# Altium PCB PCB2.PcbDoc
Units mm, origin at the board's own origin, x right, y up, seen from the top; angles counter-clockwise.
Board outline 137.5 x 80 mm, 2 copper layers (Top Layer, Bottom Layer); 29 components, 27 nets, 113 pads, 0 vias.
Unrouted connection lines stored in the file: 1.
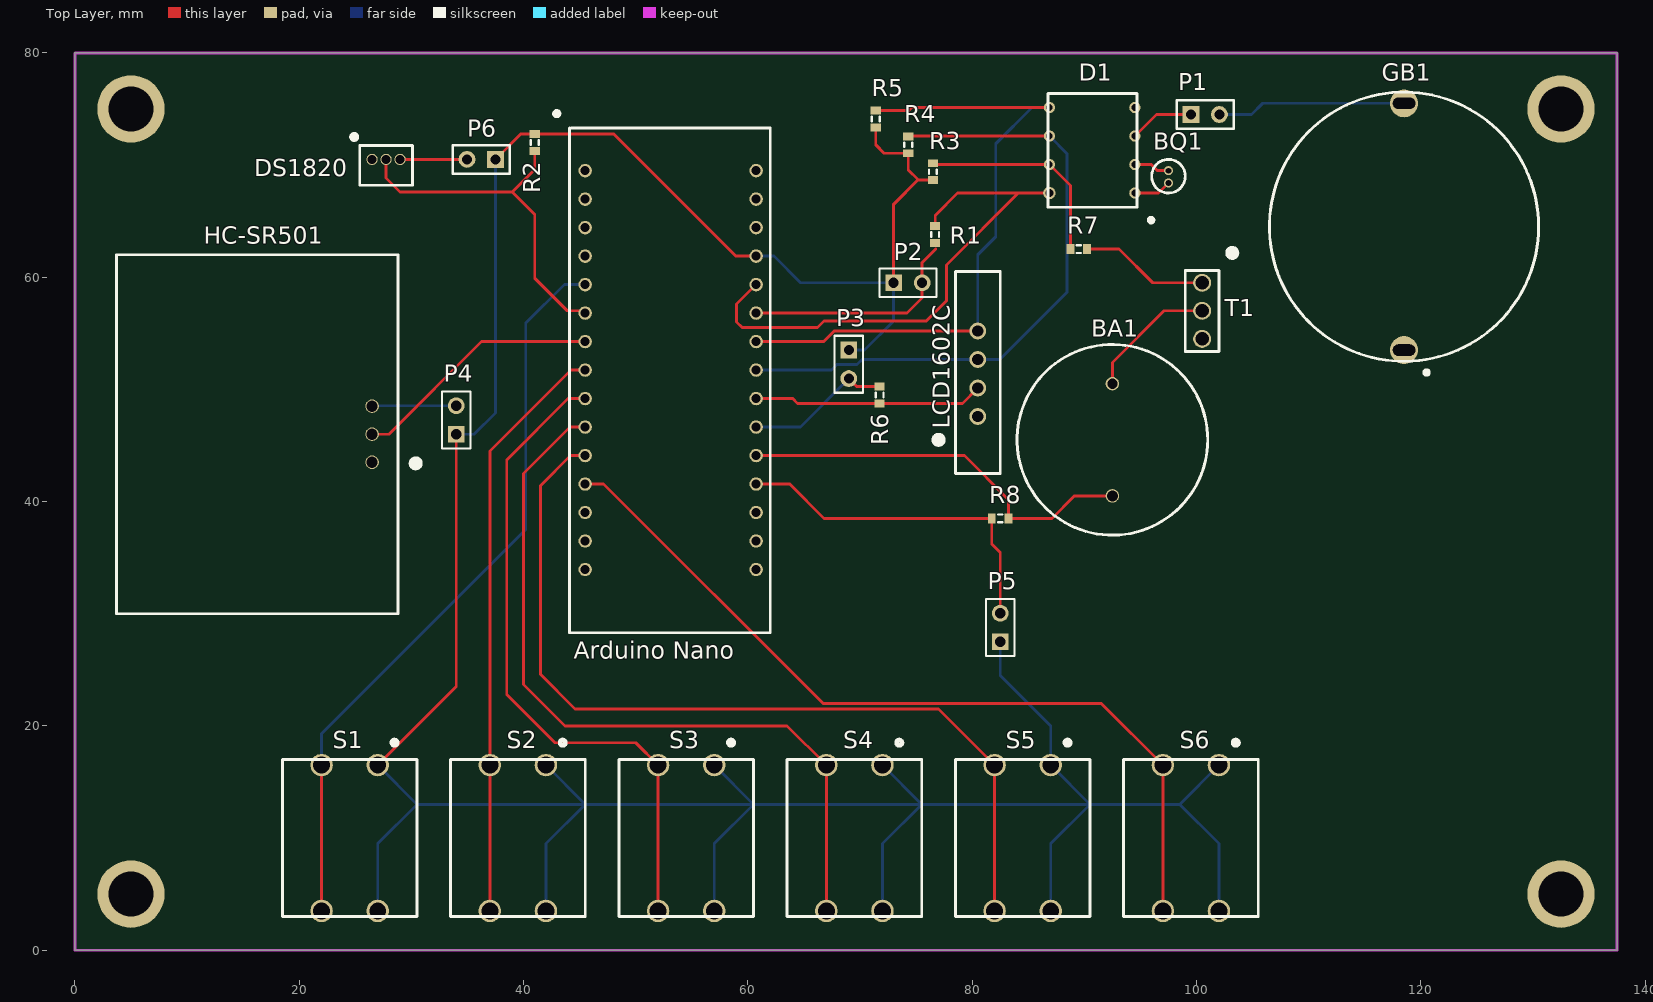
[diagram p0: Top Layer view]
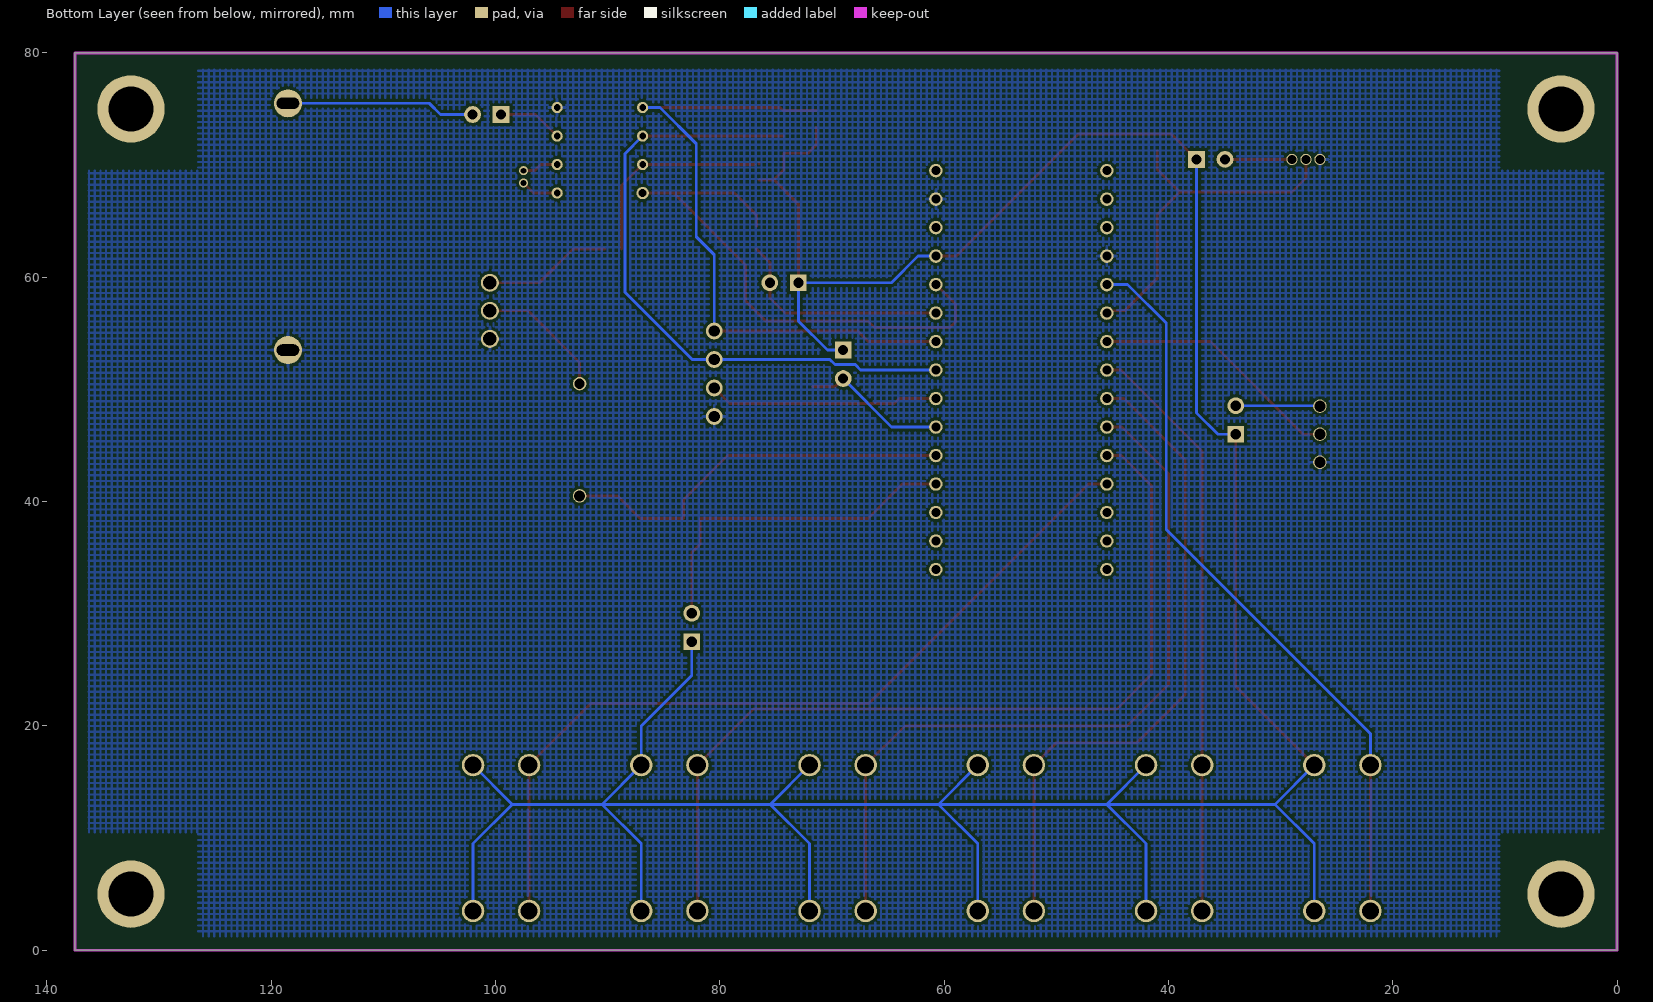
[diagram p1: Bottom Layer view, seen from below]

## Layer stack, top to bottom
Top Solder: solder mask 0.0102, Solder Resist, Dk 3.5
Top Layer: signal copper 0.0356
Dielectric 1: dielectric 0.32, FR-4, Dk 4.8
Bottom Layer: signal copper 0.0356
Bottom Solder: solder mask 0.0102, Solder Resist, Dk 3.5

## Board outline
0,0 0,80 137.5,80 137.5,0

## Design rules (kind name [scope] priority, off if disabled: settings)
Clearance [All] p1: gap=0.254
Height [All] p1: minheight=0 maxheight=100 prefheight=12.7
PolygonConnect [All] p1: connectstyle=Relief reliefconductorwidth=0.254 reliefentries=4 polygonreliefangle="90 Angle" airgapwidth=0.254
RoutingVias [All] p1: holewidth=0.711 width=1.27 viastyle="Through Hole" minholewidth=0.711 minwidth=1.27 maxholewidth=0.711 maxwidth=1.27
SolderMaskExpansion [All] p1: expansion=0.102
Width [All] p1: maxlimit=2.54 minlimit=0.15 preferedwidth=0.254
28 further rules are at their usual default settings.

## Components (designator, comment, footprint, x,y, rotation, side; value= is the part's Value field where it differs from the comment)
"Arduino Nano" "Arduino Nano" "Arduino Nano" 45.5,69.5 r90 top (schematic designator X2)
BA1 "PIEZO" "Piezo Buzzer" 92.5,45.5 r270 top
BQ1 "DT-38" DT-38 97.5,69.5 r270 top
D1 "DS1307" DS1307 94.5,67.5 r90 top
DS1820 "DS1820" DS1820 26.5,70.5 r0 top (schematic designator X4)
GB1 "CR2032" "BAT CR2032 3V" 118.5,64.5 r90 top
HC-SR501 "HC-SR501" HC-SR501 26.5,43.5 r90 top (schematic designator X3)
LCD1602C "LCD1602C" LCD1602 80.5,42.5 r90 top (schematic designator X1)
P1 "Header 2" HDR1X2 99.5,74.5 r0 top
P2 "Header 2" HDR1X2 73,59.5 r0 top
P3 "Header 2" HDR1X2 69,53.5 r270 top
P4 "Header 2" HDR1X2 34,46 r90 top
P5 "Header 2" HDR1X2 82.5,27.5 r90 top
P6 "Header 2" HDR1X2 37.5,70.5 r180 top
R1 "510" J1-0603 76.7,63.8 r270 top
R2 "4K7" J1-0603 41,72 r90 top
R3 "4K7" J1-0603 76.5,69.4 r270 top
R4 "4K7" J1-0603 74.3,71.8 r270 top
R5 "4K7" J1-0603 71.4,74.1 r270 top
R6 "2K4" J1-0603 71.75,49.5 r90 top
R7 "100" J1-0603 89.5,62.5 r180 top
R8 "510" J1-0603 82.5,38.5 r180 top
S1 "12X12 mm BUTTON" "12X12mm BUTTON" 24.5,9.5 r0 top
S2 "12X12 mm BUTTON" "12X12mm BUTTON" 39.5,9.5 r0 top
S3 "12X12 mm BUTTON" "12X12mm BUTTON" 54.5,9.5 r0 top
S4 "12X12 mm BUTTON" "12X12mm BUTTON" 69.5,9.5 r0 top
S5 "12X12 mm BUTTON" "12X12mm BUTTON" 84.5,9.5 r0 top
S6 "12X12 mm BUTTON" "12X12mm BUTTON" 99.5,9.5 r0 top
T1 "КТ315" KT315 100.5,59.5 r270 top

## Footprints (in the part's own frame and the unit in brackets; to place one, negate y for a bottom-side part, rotate by r counter-clockwise, add the part's x,y. Pads: shape width x height; smd on the part's side, far side on the other; paste and mask are expansions set on the pad)
"12X12mm BUTTON" [mm]
  round 2 hole 1.5: 1(2.5,7) 2(2.5,-6) 3(-2.5,7) 4(-2.5,-6)
  silkscreen extent -6,-6.5 6,9.32, body extent -6,-6.46 6,7.46, height 8.5
"Arduino Nano" [mm]
  round 1.2 hole 0.8: 1(0,0) 2(-2.54,0) 3(-5.08,0) 4(-7.62,0) 5(-10.16,0) 6(-12.7,0) 7(-15.24,0) 8(-17.78,0) 9(-20.32,0) 10(-22.86,0) 11(-25.4,0) 12(-27.94,0) 13(-30.48,0) 14(-33.02,0) 15(-35.56,0) 16(-35.56,-15.24) 17(-33.02,-15.24) 18(-30.48,-15.24) 19(-27.94,-15.24) 20(-25.4,-15.24) 21(-22.86,-15.24) 22(-20.32,-15.24) 23(-17.78,-15.24) 24(-15.24,-15.24) 25(-12.7,-15.24) 26(-10.16,-15.24) 27(-7.62,-15.24) 28(-5.08,-15.24) 29(-2.54,-15.24) 30(0,-15.24)
  silkscreen extent -41.2,-16.5 5.36,2.82, body extent -41.19,-16.62 3.81,1.38, height 7.85
"BAT CR2032 3V" [mm]
  round 2.5 hole 1 slot 2 at 90 deg: 1(-11,0) 2(11,0)
  silkscreen extent -13.25,-12 12,12, body extent -10.9,-10.6 10.9,10, height 4.3
DS1307 [mm]
  round 1 hole 0.6: 1(0,0) 2(2.54,0) 3(5.08,0) 4(7.62,0) 5(7.62,7.62) 6(5.08,7.62) 7(2.54,7.62)
  round 1.1 hole 0.7: 8(0,7.62)
  silkscreen extent -2.67,-1.7 8.89,7.75, body extent -1.29,-0.15 8.91,7.77, height 3.7
DS1820 [mm]
  round 1 hole 0.8: 1(0,0) 2(1.25,0) 3(2.5,0)
  silkscreen extent -1.92,-2.3 3.6,2.32, body extent -1.16,-2.48 3.67,0.95, height 5.37
DT-38 [mm]
  round 0.8 hole 0.5: 1(0,0) 2(1.1,0)
  silkscreen extent -1,-1.5 2,1.5
HC-SR501 [mm]
  round 1.2 hole 1: 1(0,0) 2(2.5,0) 3(5,0)
  silkscreen extent -13.5,-4.39 18.5,22.8, body extent -13.5,-2.25 18.5,22.75, height 16
HDR1X2 [mm] "Connector; Header; 2 Position"
  rect 1.5x1.5 hole 0.9: 1(0,0)
  round 1.5 hole 0.9: 2(2.54,0)
  silkscreen extent -1.27,-1.27 3.81,1.27
J1-0603 [mm] "Chip Resistor, Body 1.6x0.8mm, IPC High Density"
  rect 0.7x0.9 smd: 1(-0.75,0) 2(0.75,0)
  silkscreen extent -0.2,-0.35 0.2,0.35, body extent -0.85,-0.48 0.85,0.48, height 0.9
KT315 [mm]
  round 1.6 hole 1.2: 1(0,0) 2(2.5,0) 3(5,0)
  silkscreen extent -3.16,-1.5 6.12,3.19, body extent -0.95,-1.4 6.25,1.6, height 6
LCD1602 [mm]
  round 1.5 hole 1: 1(5.08,0) 2(7.62,0) 3(10.16,0) 4(12.7,0)
  silkscreen extent 0,-2 18,4
"Piezo Buzzer" [mm]
  round 1.2 hole 0.9: 1(-5,0)
  round 1.2 hole 1: 2(5,0)
  silkscreen extent -8.5,-8.5 8.5,8.5

## Part data
BA1: library part Piezo
GB1: library part "BAT CR2032 3V"
P1 P2 P3 P4 P5 P6: "Header, 2-Pin"
R1 R2 R3 R4 R5 R6 R7 R8: library part Res3, "Resistor"
T1: library part KT315

## Free pads (board coordinates)
  round 6 hole 4: 0(5,5) 0(5,75) 0(132.5,5) 0(132.5,75)

## Nets (pads, with @x,y where several pads share a name; then routed paths per layer and width w, separated by ;. In a path a pad name is that pad's centre, name@x,y a point inside that pad or via, vN(x,y) a via of type N, cw(c..) or ccw(c..) an arc to the next point about the centre after c; other vN are vias at no path point)
3V: GB1.2 P1.2 | length 16.9
  Bottom Layer w0.254: P1.2 104.9,74.5 105.9,75.5 GB1.2
5V: "Arduino Nano.27" P2.1 P3.1 P4.1 P5.1 P6.1 R2.2 R3.2 R4.2 R5.2 S1.1 S1.2 S2.1 S2.2 S3.1 S3.2 S4.1 S4.2 S5.1 S5.2 S6.1 S6.2 | length 304.9
  Top Layer w0.254: S1.1 34,23.5 P4.1 ; P6.1 39.75,72.75 48.05,72.75 58.92,61.88 60.74,61.88 ; R5.2 71.4,71.8 72.15,71.05 R4.2 74.3,70.85 74.3,69.9 74.3,69.55 75.2,68.65 ; P2.1@73,59.5 73,66.5 75.15,68.65 75.2,68.65 ; R3.2 75.2,68.65
  Bottom Layer w0.254: S1.2 27,9.5 30.5,13 ; S1.1 30.5,13 ; P4.1 35.6,46 37.5,47.9 P6.1 ; S2.2 42,9.5 45.5,13 ; S2.1 45.5,13 ; S3.2 57,9.5 60.5,13 ; S3.1 60.5,13 ; 60.74,61.88 62.32,61.88 64.7,59.5 73,59.5 73,56.1 70.4,53.5 P3.1 ; S4.2 72,9.5 75.5,13 ; S4.1 75.5,13 ; P5.1 82.5,24.5 87,20 S5.1 90.5,13 ; S5.2 87,9.5 90.5,13 ; S6.2 102,9.5 98.5,13 ; S6.1 98.5,13 ; 30.5,13 45.5,13 ; 45.5,13 60.5,13 ; 60.5,13 75.5,13 ; 75.5,13 90.5,13 ; 90.5,13 98.5,13
A0: "Arduino Nano.19" P5.2 R8.2 | length 31
  Top Layer w0.254: 60.74,41.56 63.74,41.56 66.8,38.5 R8.2 81.75,36.2 82.5,35.45 P5.2
A1: "Arduino Nano.20" BA1.2 R8.1 | length 35.9
  Top Layer w0.254: 60.74,44.1 79.3,44.1 83.25,40.15 R8.1 87.1,38.5 89.1,40.5 BA1.2
A2: "Arduino Nano.21" P3.2 R6.2 | length 13.1
  Top Layer w0.254: P3.2 69.71,50.25 R6.2
  Bottom Layer w0.254: 60.74,46.64 64.68,46.64 P3.2
A3: "Arduino Nano.22" LCD1602C.2 R6.1 | length 20.5
  Top Layer w0.254: 60.74,49.18 64,49.18 64.43,48.75 79.13,48.75 LCD1602C.2
A6: "Arduino Nano.25" P2.2 R1.2 | length 20.2
  Top Layer w0.254: 60.74,56.8 74.2,56.8 75.54,58.14 75.54,61.29 76.75,62.5
A7: "Arduino Nano.26" D1.8 R1.1 | length 48.2
  Top Layer w0.254: 60.74,59.34 59,57.6 59,56 59.5,55.5 66.2,55.5 66.8,56.1 75.9,56.1 77.7,57.9 77.7,61.1 84.1,67.5 ; R1.1 76.7,65.5 78.7,67.5 D1.8
COLLECTOR: BA1.1 T1.2 | length 11.8
  Top Layer w0.254: BA1.1 92.5,52.4 97.1,57 T1.2
D2: "Arduino Nano.5" S1.3 S1.4 | length 66.7
  Top Layer w0.254: S1.4 S1.3
  Bottom Layer w0.254: S1.3 22,19.3 40.2,37.5 40.2,55.9 43.64,59.34 45.5,59.34
D5: "Arduino Nano.8" S2.3 S2.4 | length 52.5
  Top Layer w0.254: S2.4 37,44.5 44.22,51.72 45.5,51.72
D6: "Arduino Nano.9" S3.3 S3.4 | length 59.3
  Top Layer w0.254: 45.5,49.18 43.98,49.18 38.5,43.7 38.5,22.8 42.8,18.5 50,18.5 S3.3 S3.4
D7: "Arduino Nano.10" S4.3 S4.4 | length 69
  Top Layer w0.254: 45.5,46.64 44.14,46.64 40,42.5 40,23.7 43.7,20 63.5,20 S4.3 S4.4
D8: "Arduino Nano.11" S5.3 S5.4 | length 78.8
  Top Layer w0.254: 45.5,44.1 44.2,44.1 41.5,41.4 41.5,24.6 44.6,21.5 77,21.5 S5.3 S5.4
D9: "Arduino Nano.12" S6.3 S6.4 | length 74.9
  Top Layer w0.254: 45.5,41.56 47.14,41.56 66.692,22.008 77.21,22.008 77.218,22 91.5,22 S6.3 S6.4
DQ: "Arduino Nano.6" DS1820.2 R2.1 | length 32.2
  Top Layer w0.254: DS1820.2 27.75,68.85 29,67.6 39,67.6 ; R2.1 41,69.6 39,67.6 ; 45.5,56.8 45.3,57 43.9,57 41,59.9 41,65.6 39,67.6
GND: "Arduino Nano.4" "Arduino Nano.29" D1.4 DS1820.1 GB1.1 HC-SR501.1 LCD1602C.1 T1.3 | length 0
  Bottom Layer w0.254: DS1820.1 DS1820.1@26.504,70.5
NetD1_3: D1.3 P1.1 | length 5.8
  Top Layer w0.254: D1.3 96.42,74.5 P1.1
NetP4_2: HC-SR501.3 P4.2 | length 7.5
  Bottom Layer w0.254: HC-SR501.3 26.54,48.54 P4.2
NetP6_2: DS1820.3 P6.2 | length 6
  Top Layer w0.254: DS1820.3 P6.2
NetR7_1: R7.1 T1.1 | length 11.5
  Top Layer w0.254: R7.1 93.1,62.5 96.1,59.5 T1.1
OUTPUT: "Arduino Nano.7" HC-SR501.2 | length 22.4
  Top Layer w0.254: HC-SR501.2 28,46 36.26,54.26 45.5,54.26
SCL: "Arduino Nano.24" D1.5 LCD1602C.4 R5.1 | length 59.2
  Top Layer w0.254: 60.74,54.26 66.76,54.26 67.7,55.2 LCD1602C.4 ; R5.1 74.35,74.85 74.62,75.12 D1.5
  Bottom Layer w0.254: LCD1602C.4 80.5,62 82.1,63.6 82.1,71.9 85.32,75.12 D1.5
SDA: "Arduino Nano.23" D1.6 LCD1602C.3 R4.1 | length 57.7
  Top Layer w0.254: R4.1@74.33,72.58 D1.6
  Bottom Layer w0.254: 60.74,51.72 67.443,51.72 67.923,52.2 69.739,52.2 70.199,52.66 82.46,52.66 88.46,58.66 88.46,71 D1.6
SQW: D1.7 R3.1 R7.2 | length 18.3
  Top Layer w0.254: R3.1@76.5,70.1 R3.1 ; R3.1@76.91,70.04 D1.7 88.75,68.17 R7.2
X1: BQ1.2 D1.1 | length 3.4
  Top Layer w0.254: D1.1 96.25,67.5 96.6,67.5 BQ1.2
X2: BQ1.1 D1.2 | length 3.2
  Top Layer w0.254: D1.2 95.96,70.04 96.5,69.5 BQ1.1
pads on no net: "Arduino Nano.1" "Arduino Nano.2" "Arduino Nano.3" "Arduino Nano.13" "Arduino Nano.14" "Arduino Nano.15" "Arduino Nano.16" "Arduino Nano.17" "Arduino Nano.18" "Arduino Nano.28" "Arduino Nano.30"

## Polygon pours and split planes (outlines as drawn)
GND on Bottom Layer "Top Layer-No Net" (hatched 90Degree grid 0.508 track 0.203, remove dead copper, pour order 2): 1.25,1.25 136.25,1.25 136.25,78.75 136,78.5 1.25,78.5 1.25,1.25

## Keep-outs
Keep-Out Layer:
  lines w0.254: 0,0 0,70 0,80 137.5,80 137.5,0 0,0

## Other copper
Bottom Layer:
  pour cut-out: 137.5,80 137.5,69.5 126.5,69.5 126.5,80 137.5,80
  pour cut-out: 137.5,0 137.5,10.5 126.5,10.5 126.5,0
  pour cut-out: 0,80 10.5,80 10.5,69.5 0,69.5 0,80
  pour cut-out: 0,0 10.5,0 10.5,10.5 0,10.5